# EAGLE board yusynth_S_n_H (EAGLE 7.1.0)
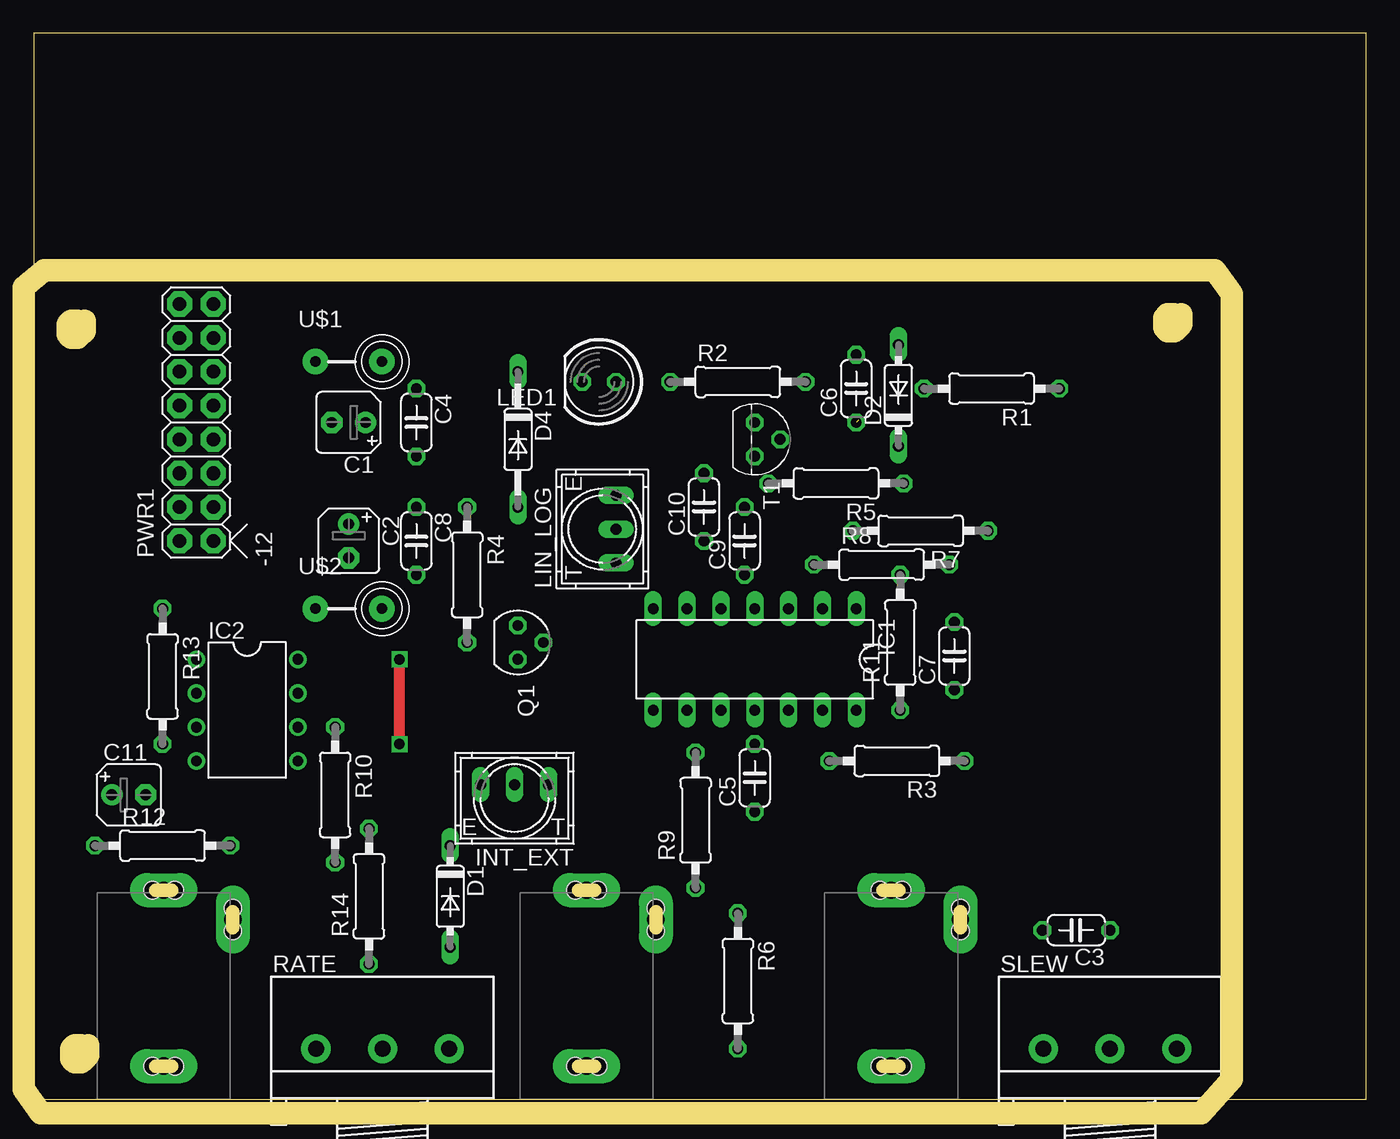
[diagram p0: board, top side]
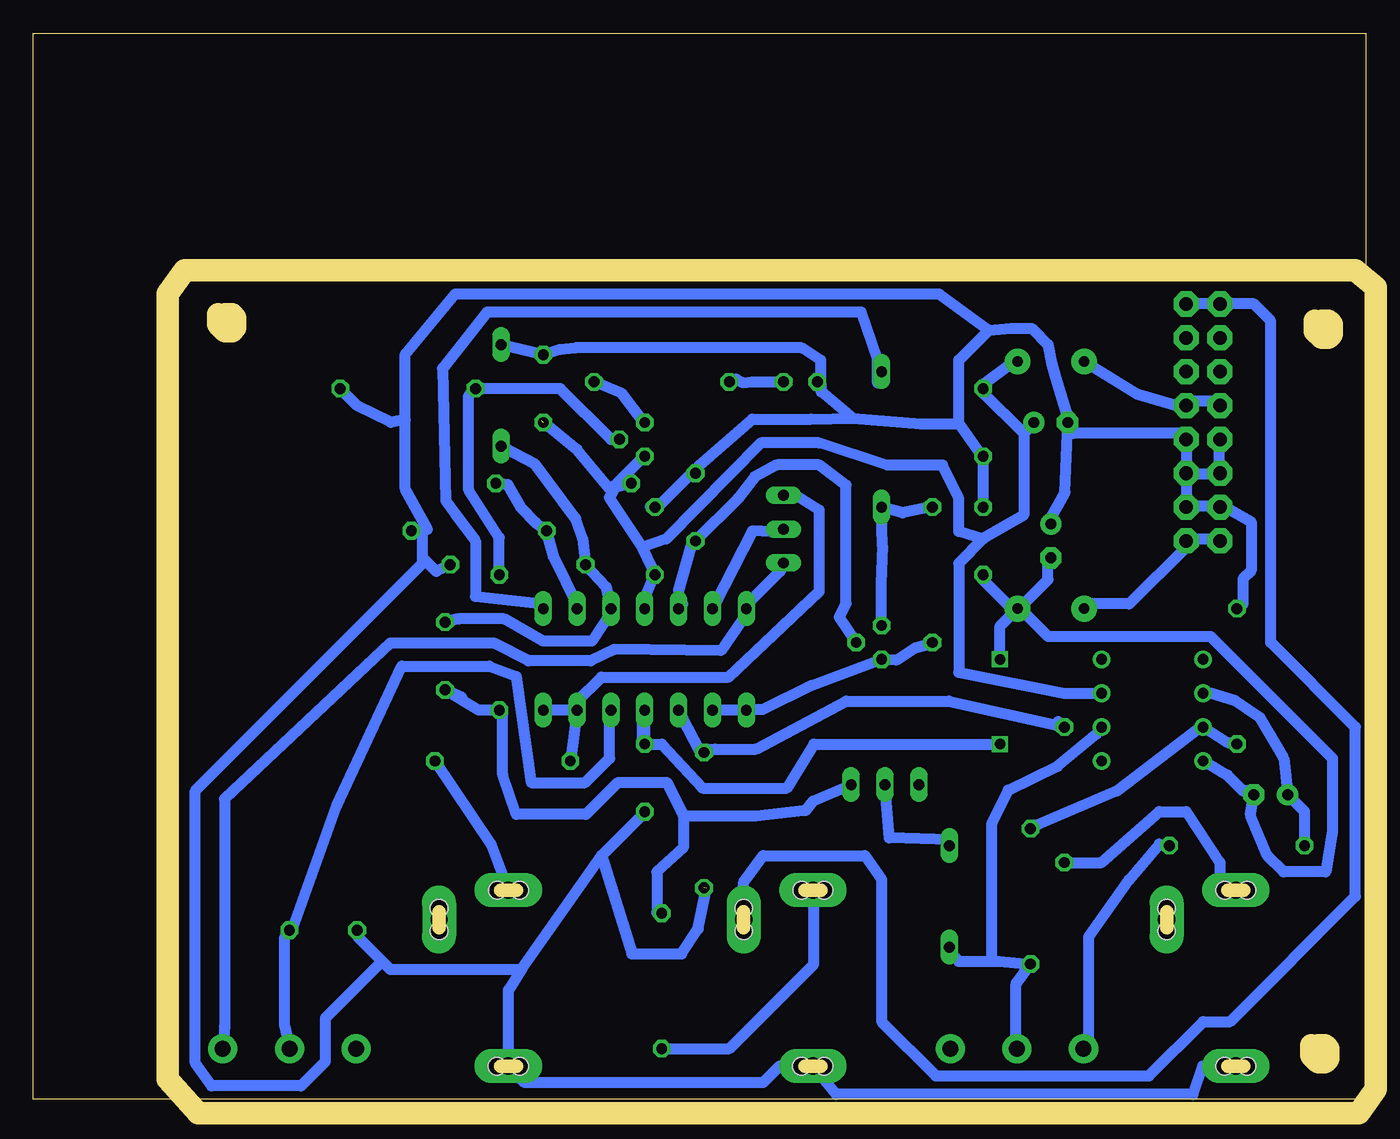
[diagram p1: board, bottom side, seen from below]

Size 100 x 80 mm. Coordinates in mm from the lower left corner, seen from the top.
Outline: 0,0 100,0 100,80 0,80 0,0
Copper layers (1*16): Top 0.035mm / dielectric 1.5mm / Bottom 0.035mm
Design rules "default *": minimum track width 32mil, minimum drill 31mil, track to track 16mil, track to pad 16mil, pad to pad 16mil, via to via 16mil, smd to smd 8mil, copper to edge 0mil, drill to drill 16mil, minimum pad ring 10mil, minimum via ring 8mil, stop-mask expansion 4mil, vias tented up to drill 0mil, thermal gap 10mil
Milling: 29 lines

## Footprints (pad centres in the part's own frame; a part is rotated, then mirrored left to right if it is on the bottom)
B45181A = drill 0.813 pad 1.6: + -1.27,0 | drill 0.813 pad 1.6 octagon: - 1.27,0
C050-024X044 = drill 0.813 octagon: 1 -2.54,0; 2 2.54,0
DO35-7 = drill 0.813 long: A 3.81,0; C -3.81,0
DO35-10 = drill 0.813 long: A 5.08,0; C -5.08,0
ERTHENVAR-JACK-90DEG = drill 1.3 pad 2.54 long: P$1 5,-2.5; P$2 -0.2,-13.5; P$3 5,-15.7 | hole 1.3: 5.842,-2.489; 4.14,-2.489; -0.203,-12.649; -0.203,-14.351; 5.842,-15.697; 4.166,-15.697
DIL14 = drill 0.813 long: 1 -7.62,-3.81; 2 -5.08,-3.81; 3 -2.54,-3.81; 4 0,-3.81; 5 2.54,-3.81; 6 5.08,-3.81; 7 7.62,-3.81; 8 7.62,3.81; 9 5.08,3.81; 10 2.54,3.81; 11 0,3.81; 12 -2.54,3.81; 13 -5.08,3.81; 14 -7.62,3.81
DIL08 = drill 0.813 pad 1.27: 1 -3.81,-3.81; 2 -1.27,-3.81; 3 1.27,-3.81; 4 3.81,-3.81; 5 3.81,3.81; 6 1.27,3.81; 7 -1.27,3.81; 8 -3.81,3.81
9077-1 = drill 0.813 long: 1 -2.54,-1.016; 2 0,-1.016; 3 2.54,-1.016
LED5MM = drill 0.813 octagon: A -1.27,0; K 1.27,0
POWER_16 = drill 1.016 pad 1.88 octagon: 1 -6.35,-1.27; 2 -6.35,1.27; 3 -3.81,-1.27; 4 -3.81,1.27; 5 -1.27,-1.27; 6 -1.27,1.27; 7 1.27,-1.27; 8 1.27,1.27; 9 3.81,-1.27; 10 3.81,1.27; 11 6.35,-1.27; 12 6.35,1.27; 13 8.89,-1.27; 14 8.89,1.27; 15 11.43,-1.27; 16 11.43,1.27
SOT54C = drill 0.813 octagon: D 1.27,0; G -1.27,0; S 0,1.905
0207/10 = drill 0.813 octagon: 1 -5.08,0; 2 5.08,0
3RP/1610N = drill 1.2 pad 2.184: 1 -5,0; 2 0,0; 3 5,0
TO92 = drill 0.813 octagon: 1 1.27,0; 2 0,1.905; 3 -1.27,0
FB = drill 0.8 pad 1.93: P$1 -2.5,0; P$2 2.5,0

## Placement (x,y rotation side)
C1  10u  [B45181A]  23.62,50.8 180 top
C2  10u  [B45181A]  23.62,41.91 270 top
C3  680n  [C050-024X044]  78.23,12.7 180 top
C4  100n  [C050-024X044]  28.7,50.8 270 top
C5  100n  [C050-024X044]  54.1,24.13 90 top
C6  100n  [C050-024X044]  61.72,53.34 90 top
C7  1n  [C050-024X044]  69.09,33.27 90 top
C8  100n  [C050-024X044]  28.7,41.91 270 top
C9  100n  [C050-024X044]  53.34,41.91 90 top
C10  100n  [C050-024X044]  50.29,44.45 90 top
C11  10u  [B45181A]  7.11,22.86 0 top
D1  1N4148DO35-7  [DO35-7]  31.24,15.24 270 top
D2  1N4148DO35-7  [DO35-7]  64.9,52.83 90 top
D4  1N4148DO35-10  [DO35-10]  36.32,49.53 270 top
GATE  AUDIO-JACK  [ERTHENVAR-JACK-90DEG]  46.48,0 180 top
IC1  TL074P  [DIL14]  54.1,33.02 180 top
IC2  TL071P  [DIL08]  16,29.21 270 top
INT_EXT  9077-1  [9077-1]  36.07,22.61 180 top
LED1  [LED5MM]  42.42,53.85 180 top
LIN_LOG  9077-1  [9077-1]  42.67,42.8 90 top
OUT  AUDIO-JACK  [ERTHENVAR-JACK-90DEG]  69.34,0 180 top
PWR1  POWER  [POWER_16]  12.19,48.26 90 top
Q1  BF245  [SOT54C]  36.32,34.29 270 top
R1  22k  [0207/10]  71.88,53.34 180 top
R2  1k  [0207/10]  52.83,53.85 0 top
R3  1k  [0207/10]  64.77,25.4 180 top
R4  2M2  [0207/10]  32.51,39.37 270 top
R5  100k  [0207/10]  60.2,46.23 180 top
R6  1k  [0207/10]  52.83,8.89 270 top
R7  10k  [0207/10]  66.55,42.67 180 top
R8  100k  [0207/10]  63.63,40.13 0 top
R9  100k  [0207/10]  49.66,20.95 90 top
R10  100R  [0207/10]  22.61,22.86 270 top
R11  10k  [0207/10]  65.02,34.29 90 top
R12  2k2  [0207/10]  9.65,19.05 0 top
R13  100k  [0207/10]  9.65,31.75 270 top
R14  120k  [0207/10]  25.15,15.24 90 top
RATE  500k rev log  [3RP/1610N]  26.16,3.81 0 top
SIGNAL_IN  AUDIO-JACK  [ERTHENVAR-JACK-90DEG]  14.73,0 180 top
SLEW  1M log  [3RP/1610N]  80.77,3.81 0 top
T1  2N3904  [TO92]  54.1,49.53 270 top
U$1  FB  [FB]  23.62,55.37 0 top
U$2  FB  [FB]  23.62,36.83 0 top

## Library data of the parts
C1-C11 R1-R14 = rcl
D1 D2 D4 = diode
GATE OUT SIGNAL_IN = erthenvar
IC1 IC2 = linear
INT_EXT LIN_LOG = switch-misc
LED1 = led
PWR1 = eurorack
Q1 = transistor-small-signal
RATE SLEW = pot
T1 = transistor
U$1 U$2 = adafruit

## Nets
+12V: C1.+ C4.1 C6.1 C9.1 IC1.4 IC2.7 R5.2 T1.1 U$1.P$2
-12V: C2.- C5.2 C8.2 C11.- IC1.11 IC2.4 U$2.P$2
GND: C1.- C2.+ C3.2 C4.2 C5.1 C6.2 C8.1 C9.2 C10.2 D2.A GATE.P$1 LED1.K OUT.P$1 PWR1.3 PWR1.4 PWR1.5 PWR1.6 PWR1.7 PWR1.8 R1.1 R7.1 R8.2 R9.1 R13.1 SIGNAL_IN.P$1
N$1: PWR1.9 PWR1.10 U$1.P$1
N$2: PWR1.1 PWR1.2 U$2.P$1
N$3: C7.1 INT_EXT.1 R6.1 R11.1
N$4: D4.C IC1.1
N$5: R2.2 T1.3
N$6: D4.A Q1.G R4.1
N$7: IC1.2 R5.1 R7.2
N$8: LED1.A R2.1
N$9: IC1.8 IC1.9 Q1.D R4.2
N$10: C7.2 D2.C IC1.3 R8.1
N$11: IC1.13 IC1.14 LIN_LOG.3 R3.2
N$12: GATE.P$2 PWR1.15 PWR1.16
N$13: C3.1 IC1.12 SLEW.2
N$14: GATE.P$3 R6.2
N$15: OUT.P$3 R3.1
N$16: IC1.10 R9.2 R10.1
N$17: R10.2 SIGNAL_IN.P$3
N$18: C10.1 IC1.5 Q1.S
N$19: IC1.7 LIN_LOG.1 SLEW.3
N$20: IC1.6 LIN_LOG.2
N$21: R1.2 R11.2 T1.2
N$22: IC2.3 R13.2 R14.2
N$23: C11.+ IC2.2 R12.1
N$24: R12.2 RATE.1
N$25: D1.A IC2.6 R14.1 RATE.2
N$26: D1.C INT_EXT.2

## Tracks (layer width: path | path; a pad name or v marks a point on that pad's centre or on a via)
+12V  (1 unrouted)
  Bottom 0.813: IC1.4 54.3,37.19 53.54,39.01 C9.1 53.54,39.88 54.3,41.43 | 56.13,46.28 56.03,46.28 56.77,45.87 | 56.13,46.28 54.89,47.55 54.28,48.16 54.3,48.16 T1.1 | 61.87,50.95 59.18,48.77 56.77,45.87 | 56.77,45.87 R5.2 | 54.3,41.43 56.77,45.16 56.13,46.28 | U$1.P$2 26.67,55.17 28.7,53.65 C4.1 28.7,53.03 25.65,49.99 | IC2.7 22.61,30.48 30.53,32.05 30.53,40.23 28.7,42.06 | 28.7,42.06 25.65,43.84 25.65,49.99 | 25.65,49.99 25.09,50.55 C1.+ | 54.3,41.43 52.48,42.06 45.39,49.28 41.02,49.28 35.92,47.6 31.75,47.6 30.53,45.11 30.53,42.62 28.7,42.06
-12V  (via drill 0.8)
  Top 0.813: v27.43,26.67 v27.43,33.02
  Bottom 0.813: IC2.4 10.36,24.33 9.2,23.16 8.69,23.16 C11.- 8.64,21.34 7.37,18.29 6.15,17.07 3,17.07 2.49,20.12 2.49,25.6 11.63,34.75 23.82,34.75 25.65,36.58 U$2.P$2 | C8.2 28.7,39.01 26.26,36.58 U$2.P$2 | C2.- 23.82,40.23 23.82,39.01 25.65,37.19 U$2.P$2 | C5.2 54.3,26.82 54.3,28.65 IC1.11 C5.2 | C5.2 52.83,26.67 49.78,23.37 43.43,23.37 41.4,26.67 v27.43,26.67 | v27.43,33.02 27.43,35.52 U$2.P$2
GND  (1 unrouted)
  Bottom 0.813: R13.1 9.2,37.19 9.2,39.06 8.59,39.67 8.59,43.33 10.41,44.4 PWR1.4 11.02,44.5 13.46,44.5 | C2.+ 23.82,43.28 22.55,45.57 C1.- 21.95,49.99 | PWR1.8 11.02,49.38 11.02,47.55 PWR1.6 11.02,46.94 13.46,46.94 | 21.95,49.99 13.46,49.99 PWR1.7 PWR1.5 13.46,46.94 | 21.95,49.99 22,49.99 23.27,54.2 23.57,55.27 23.82,56.64 25.04,57.86 26.62,57.86 28.27,57.73 | 13.46,46.94 13.46,44.5 | 13.46,44.5 PWR1.3 | D2.A C6.2 60.45,56.29 59.33,56.39 42.32,56.39 40.89,55.47 40.89,53.65 40.84,53.59 40.84,53.09 | 28.7,48.16 C8.1 | C9.2 53.7,44.5 53.09,44.5 50.65,46.94 C10.2 50.04,47.55 46.02,51.05 41.61,51.05 38.49,51.12 | 30.53,50.7 33.38,50.7 38.49,51.12 | 30.53,50.7 28.7,48.16 | 40.84,53.09 38.49,51.12 | 28.7,48.16 C4.2 | 40.84,53.09 LED1.K | 28.27,57.73 30.53,55.47 30.53,50.7 | 63.35,9.75 57.35,18.29 | 57.35,18.29 54.3,21.34 C5.1 | 63.35,9.75 73.2,9.75 73.81,10.36 | 73.81,10.36 75.64,12.19 C3.2 | 49.45,15.85 50.09,12.8 51.33,10.92 55.07,10.92 57.35,18.29 | 70.76,40.64 70.76,40.23 87.83,23.16 87.83,2.74 86.61,1.02 79.91,1.02 78.08,2.85 78.08,6.1 73.81,10.36 | 70.76,40.64 70.76,42.67 R7.1 70.41,42.77 72.08,45.82 72.08,51 | 63.35,9.75 64.34,8.21 OUT.P$1 63.11,1.27 45.21,1.27 43.98,2.5 GATE.P$1 39.74,0.38 12.95,0.38 12.23,2.5 SIGNAL_IN.P$1 | 72.08,51 73.15,50.8 75.69,52.07 R1.1 | 72.08,51 72.08,55.93 68.33,60.45 32,60.45 28.27,57.73 | R8.2 69.75,39.62 70.76,40.64
N$1
  Bottom 0.813: PWR1.10 11.02,52.43 13.46,52.43 PWR1.9 13.46,51.82 17.07,52.88 20.78,55.17 U$1.P$1
N$2
  Bottom 0.813: PWR1.2 11.02,42.06 13.46,42.06 PWR1.1 13.46,41.45 17.73,37.19 20.78,37.19 U$2.P$1
N$3
  Bottom 0.813: 51.21,21.29 51.21,18.9 53.19,17.07 53.19,14.02 R6.1 | 51.21,21.29 52.45,23.8 56.11,23.8 58.52,21.39 63.75,21.39 64.77,24.38 64.77,28.96 R11.1 66.55,29.21 C7.1 67.82,30.18 | 51.21,21.29 45.77,21.29 42.19,21.69 42.01,21.69 41.45,22.4 INT_EXT.1
N$4
  Bottom 0.813: IC1.1 61.72,37.19 66.8,37.74 66.8,41.91 68.33,43.94 69.04,44.93 69.29,54.84 65.94,59.08 37.85,59.08 36.63,55.58 36.63,53.75 D4.C
N$5
  Bottom 0.813: T1.3 54.2,50.95 54.3,50.95 55.83,52.98 R2.2
N$6
  Bottom 0.813: R4.1 32.36,44.5 34.75,44.02 D4.A 36.25,41.5 36.37,38.71 36.37,35.51 Q1.G
N$7
  Bottom 0.813: IC1.2 59.18,37.13 60.91,40.64 R7.2 62.28,43.28 63.35,44.35 64.36,46.13 R5.1
N$8
  Bottom 0.813: LED1.A 46.02,53.85 46.74,53.8 47.24,54.05 47.7,53.85 R2.1
N$9
  Bottom 0.813: IC1.9 48.82,29.26 46.99,29.26 IC1.8 46.38,29.26 45.26,29.26 41.55,31.06 Q1.D 35.23,32.97 33.81,33.88 32.97,34.14 R4.2
N$10
  Bottom 0.813: C7.2 68.07,36.07 64.67,36.07 61.72,34.39 58.06,34.39 56.64,36.58 IC1.3 56.74,37.19 57,38.46 R8.1 58.78,42.11 59.28,43.59 62.33,47.65 64.72,48.92 D2.C
N$11
  Bottom 0.813: IC1.13 R3.2 | IC1.13 59.18,29.87 57.35,31.7 47.8,31.7 41,38.12 41,44.22 42.7,45.29 LIN_LOG.3 | IC1.13 IC1.14
N$12
  Bottom 0.813: PWR1.15 13.46,59.74 11.02,59.74 PWR1.16 8.38,59.69 7.11,58.42 7.11,34.29 0.76,27.94 0.76,15.24 10.16,5.84 12.19,5.84 16.26,1.78 32.26,1.78 36.32,5.84 36.32,16.51 37.59,18.29 45.21,18.29 46.68,16.31 GATE.P$2
N$13
  Bottom 0.813: SLEW.2 81.13,5.49 81.13,12.19 C3.1 80.52,12.8 77.22,22.05 72.34,32.51 65.79,32.51 63.75,31.75 62.64,23.77 58.57,23.77 56.74,25.6 56.74,28.65 IC1.12
N$14
  Bottom 0.813: R6.2 47.75,3.81 41.4,10.16 41.4,15.62 GATE.P$3
N$15
  Bottom 0.813: OUT.P$3 65.61,19.13 R3.1
N$16
  Bottom 0.813: 48.79,26.29 48.82,26.29 R9.2 48.79,26.29 | 48.79,26.29 45.77,26.29 38.99,29.9 31.27,29.9 23.11,28.09 23.06,28.35 R10.1 | 48.79,26.29 49.99,26.21 51.26,28.65 IC1.10
N$17
  Bottom 0.813: R10.2 19.81,17.78 15.49,21.59 13.46,21.59 10.92,17.78 10.92,16.89 SIGNAL_IN.P$3
N$18
  Bottom 0.813: IC1.5 51.26,37.19 51.56,38.1 50.65,41.45 C10.1 47.12,45.09 45.85,46.74 44.2,47.62 41.02,47.62 38.99,46.1 38.99,37.21 39.5,36.2 Q1.S
N$19
  Bottom 0.813: LIN_LOG.1 43.69,40.18 43.94,39.62 46.38,37.19 IC1.7 46.38,36.58 48.39,33.68 56.39,33.78 58.17,32.92 62.84,32.92 65.43,34.24 73.2,34.24 85.65,22.55 85.65,5.49 SLEW.3
N$20
  Bottom 0.813: IC1.6 48.82,37.19 46.02,42.67 44.58,42.6 LIN_LOG.2
N$21
  Bottom 0.813: T1.2 56.64,49.53 60.45,53.34 R1.2 67.31,52.83 67.31,45.72 65.02,42.16 R11.2
N$22
  Bottom 0.813: R13.2 9.75,26.77 10.36,26.77 IC2.3 12.24,28.04 18.64,23.16 24.59,20.62 R14.2
N$23
  Bottom 0.813: IC2.2 11.63,30.48 9.8,29.92 7.92,28.65 6.15,25.6 C11.+ 4.57,21.59 R12.1
N$24
  Bottom 0.813: R12.2 15.49,19.15 17.78,16.46 20.78,12.19 20.78,4.27 RATE.1
N$25
  Bottom 0.813: 28.04,10.36 30.53,10.36 31.14,10.97 D1.A | 28.04,10.36 27.48,10.36 R14.1 26.21,8.74 26.26,8.53 26.26,4.27 RATE.2 | 28.04,10.36 28.04,20.73 26.82,23.22 23.11,24.99 20.17,27.43 IC2.6
N$26
  Bottom 0.813: INT_EXT.2 35.74,19.63 31.17,19.48 31.14,19.51 D1.C